# Altium PCB IsoUSBTest.PcbDoc
Units mm, origin at the board's own origin, x right, y up, seen from the top; angles counter-clockwise.
Board outline 42 x 28 mm, 2 copper layers (Component Side, Solder Side), stack 1.57 mm thick; 53 components, 36 nets, 156 pads, 31 vias.
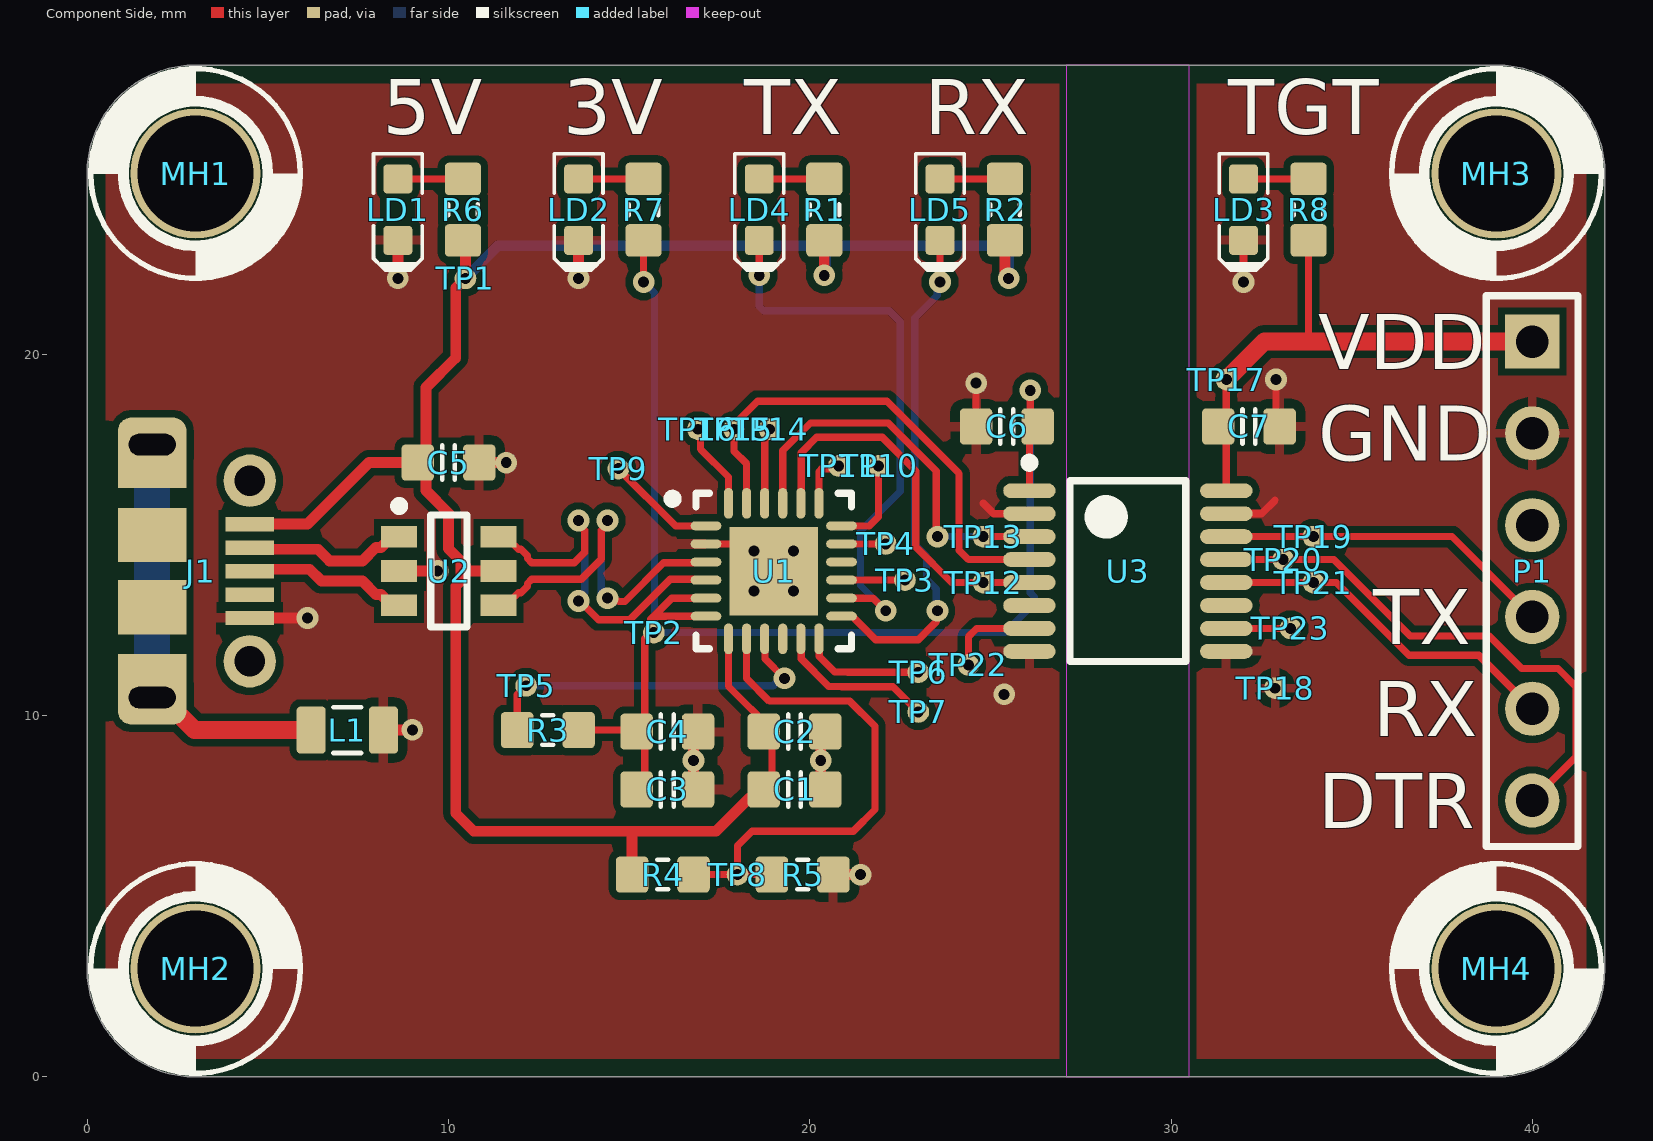
[diagram p0: Component Side view]
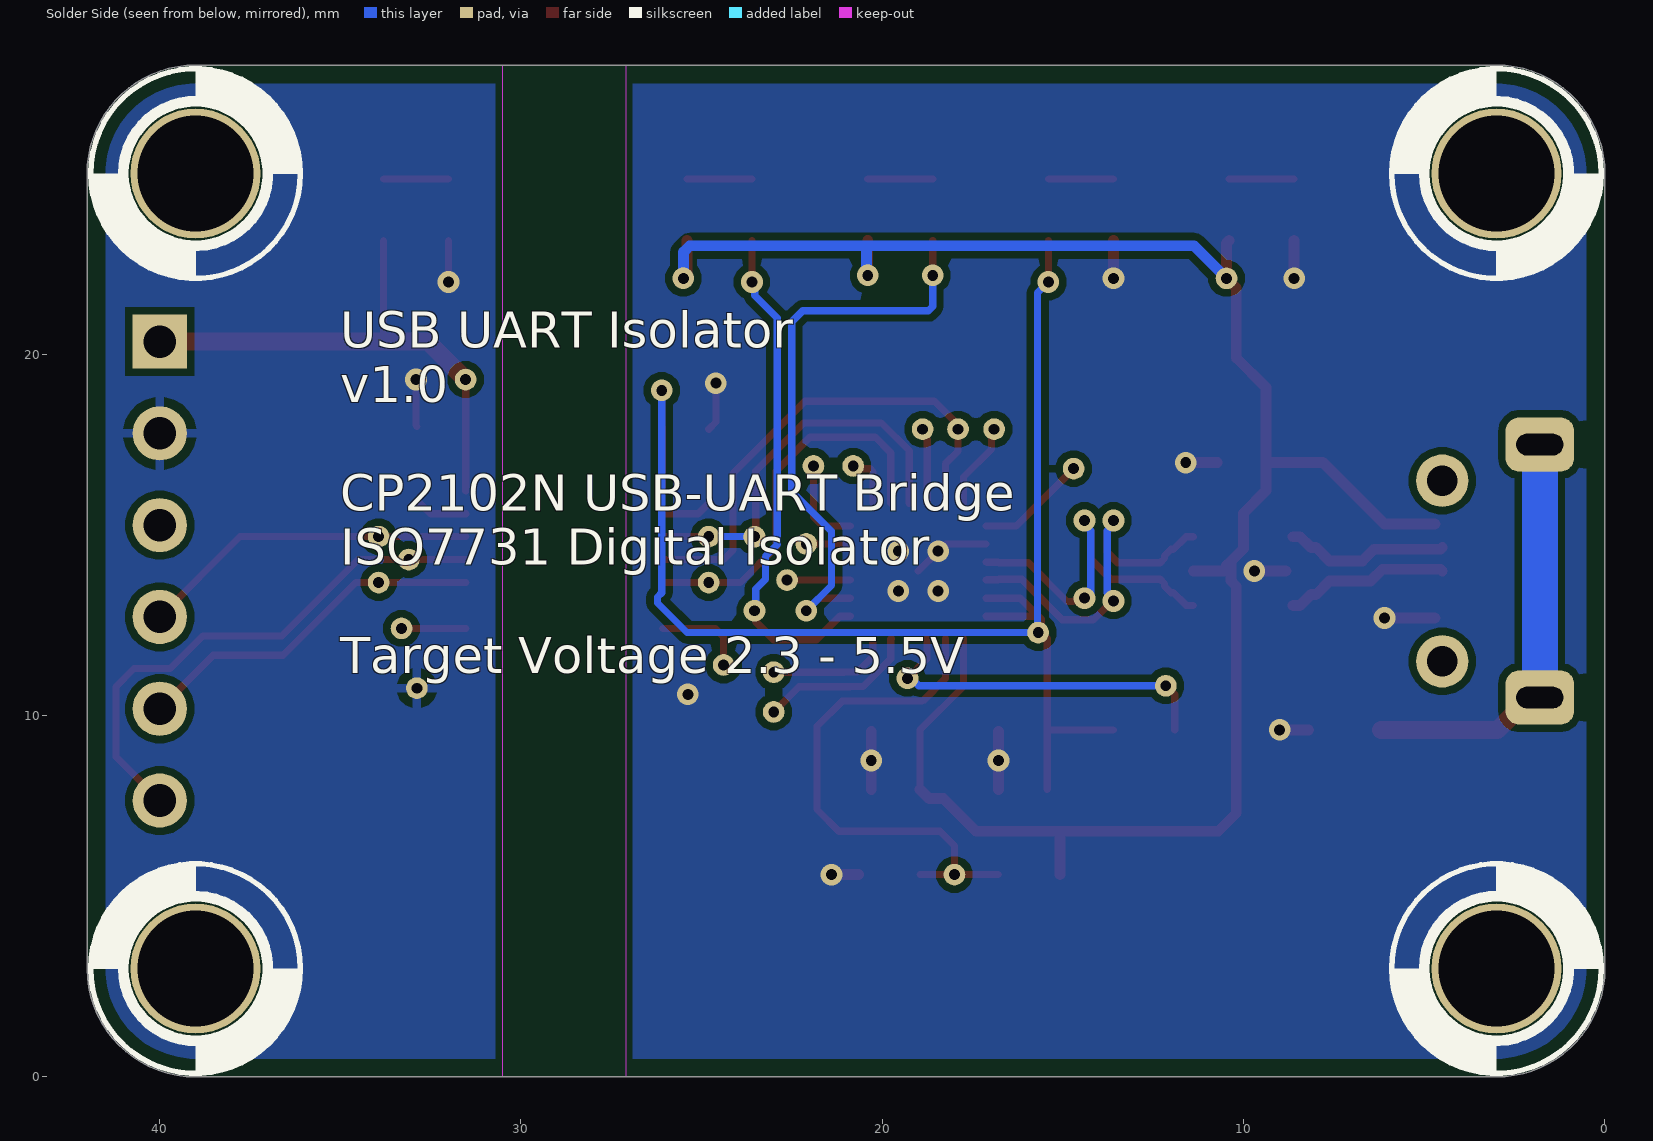
[diagram p1: Solder Side view, seen from below]
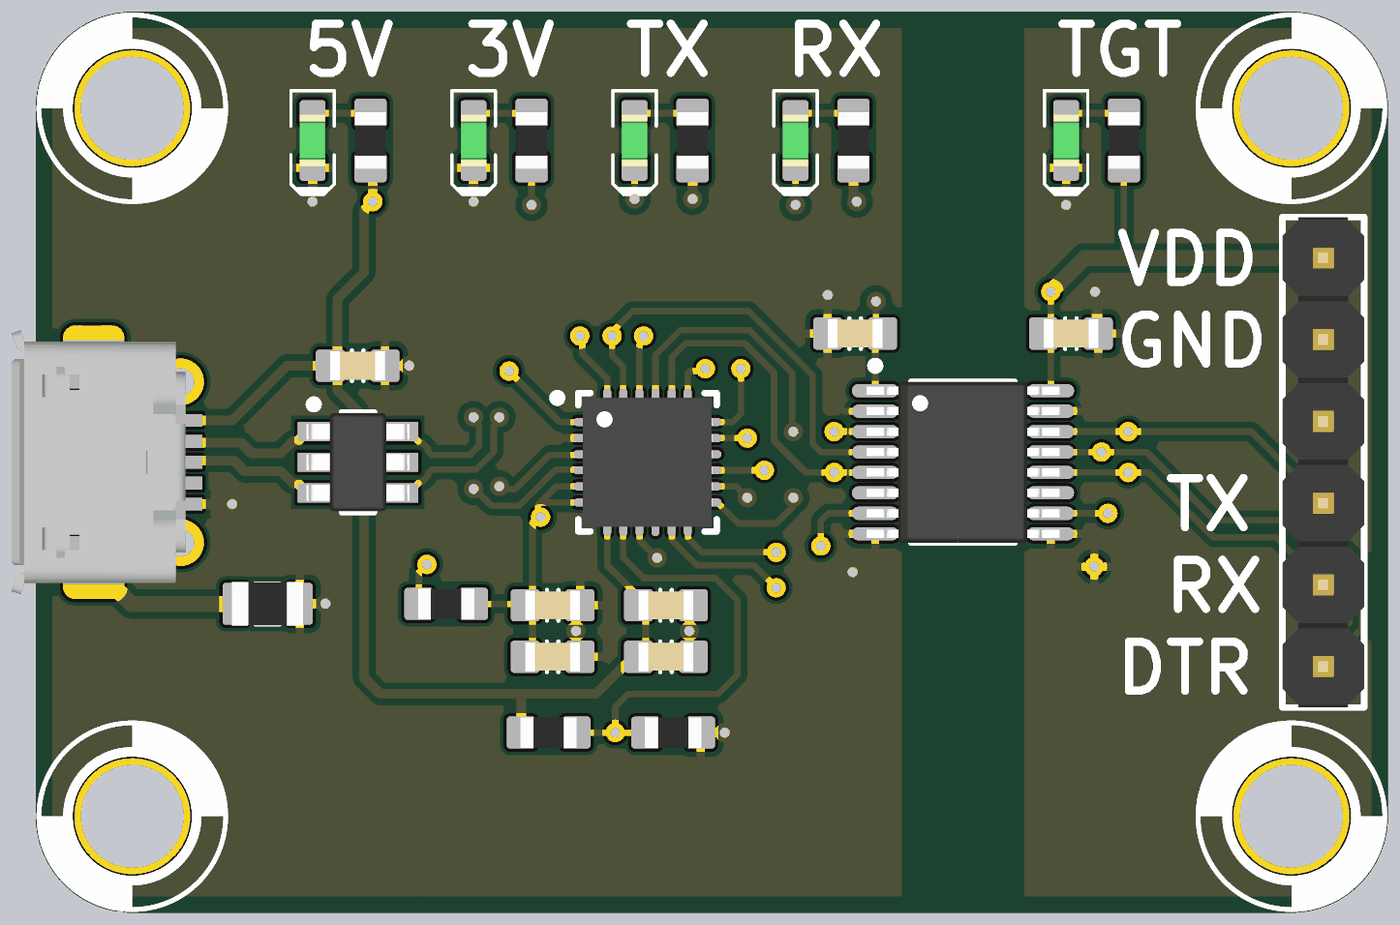
[diagram p2: 3D render of the assembled board from above, using the file's embedded part models]

## Layer stack, top to bottom
Top Solder: solder mask 0.0102, Solder Resist, Dk 3.5
Component Side: signal copper 0.035
Dielectric 3: prepreg 1.5, Dk 4.2
Solder Side: signal copper 0.035
Bottom Solder: solder mask 0.0102, Solder Resist, Dk 3.5

## Board outline
0,3 ccw(c3,3) 3,0 39,0 ccw(c39,3) 42,3 42,25 ccw(c39,25) 39,28 3,28 ccw(c3,25) 0,25

## Design rules (kind name [scope] priority, off if disabled: settings)
AssemblyTestPointUsage [All] p1 off:
AssemblyTestpoint [All] p1 off: testpointundercomponent=TRUE minsize=1.016 maxsize=2.54 preferedsize=1.524 minholesize=0 maxholesize=1.016 preferedholesize=0.813 testpointgrid=0.025 usegrid=TRUE gridtolerance=0 allowsidetop=TRUE allowsidebottom=TRUE
BoardOutlineClearance [All] p1: gap=0.254 ignorepadtopadclearanceinfootprint=FALSE except(0.5: Poly-OutlineEdge)
Clearance [All] p1: gap=0.2 ignorepadtopadclearanceinfootprint=FALSE
ComponentClearance [All] p1: gap=0.2 collisioncheckmode=3 verticalgap=0.25 showdistances=FALSE
DiffPairsRouting [All] p1: maxlimit=1 minlimit=0.254 mostfreqgap=0.254 toplayer_minwidth=0.2 toplayer_maxwidth=0.4 toplayer_prefwidth=0.254 bottomlayer_minwidth=0.2 bottomlayer_maxwidth=0.4 bottomlayer_prefwidth=0.254 maxuncoupledlength=12.7
FabricationTestPointUsage [All] p1 off: valid=0 allowmultiple=FALSE
FabricationTestpoint [All] p1 off: side=3 testpointundercomponent=TRUE minsize=1.016 maxsize=2.54 preferedsize=1.524 minholesize=0 maxholesize=1.016 preferedholesize=0.813 testpointgrid=0.025 allowsidetop=TRUE allowsidebottom=TRUE usegrid=TRUE gridtolerance=0
HoleSize [All] p1: absolutevalues=TRUE maxlimit=4 minlimit=0.025 maxpercent=80.000 minpercent=20.000
MinimumSolderMaskSliver [All] p1: minsoldermaskwidth=0
NetAntennae [All] p1 off: netantennaetolerance=0
PolygonConnect PolygonConnect_Via [All vs IsVia] p1: connectstyle=Direct reliefconductorwidth=0.254 reliefentries=4 polygonreliefangle="90 Angle" airgapwidth=0.254
PolygonConnect [All] p2: connectstyle=Relief reliefconductorwidth=0.254 reliefentries=4 polygonreliefangle="90 Angle" airgapwidth=0.254
RoutingVias [All] p1: holewidth=0.4 width=0.8 viastyle="Through Hole" minholewidth=0.3 minwidth=0.6 maxholewidth=1 maxwidth=1.5
SilkToSilkClearance [All] p1: silktosilkclearance=0.1
SilkToSolderMaskClearance SilkscreenOverComponentPads [IsPad] p1: minsilkscreentomaskgap=0 clearancetoexposedcopper=TRUE
SolderMaskExpansion [All] p1: expansion=0.102 istentingtop=FALSE
SupplyNets "Schematic Supply Nets_4" [InNet('TGT_GND')] p1: voltage=0.000
SupplyNets "Schematic Supply Nets_3" [InNet('USB_3V3')] p2: voltage=0.000
SupplyNets "Schematic Supply Nets_2" [InNet('TGT_VCC')] p3: voltage=0.000
SupplyNets "Schematic Supply Nets_1" [InNet('USBVCC')] p4: voltage=0.000
SupplyNets "Schematic Supply Nets" [InNet('USB_GND')] p5: voltage=0.000
Width Width_1 [All] p1: maxlimit=3 minlimit=0.2 preferedwidth=0.2 minimp=50.000000 maximp=50.000000 favimp=50.000000
19 further rules are at their usual default settings.

## Classes and differential pairs
differential pair USB_RAW: +USB_RAW_P -USB_RAW_N
differential pair USB_D: +USB_D_P -USB_D_N

## Components (designator, comment, footprint, x,y, rotation, side; value= is the part's Value field where it differs from the comment)
C1 "Capacitor" CAPC1608X90N 19.575,7.955 r180 top value=4.7µF
C2 "Capacitor" CAPC1608X90N 19.575,9.555 r180 top value=0.1µF
C3 "Capacitor" CAPC1608X90N 16.055,7.955 r180 top value=4.7µF
C4 "Capacitor" CAPC1608X90N 16.055,9.555 r180 top value=0.1µF
C5 "Capacitor" CAPC1608X90N 10,17 r180 top value=0.1µF
C6 "Capacitor" CAPC1608X90N 25.45,18 r0 top value=0.1µF
C7 "Capacitor" CAPC1608X90N 32.15,18 r180 top value=0.1µF
J1 "" "Micro-USB B Molex 105017-0001" 4.5,14 r270 top
L1 "" "Res 2012-0805" 7.2,9.6 r0 top
LD1 "LEDG  0603" "LED 1608-0603" 8.6,24 r270 top
LD2 "LEDG  0603" "LED 1608-0603" 13.6,24 r270 top
LD3 "LEDG  0603" "LED 1608-0603" 32,24 r270 top
LD4 "" "LED 1608-0603" 18.6,24 r270 top
LD5 "" "LED 1608-0603" 23.6,24 r270 top
MH1 "Screw Hole" M3-Hole-2 3,25 r90 top
MH2 "Screw Hole" M3-Hole-2 3,3 r0 top
MH3 "Screw Hole" M3-Hole-2 39,25 r0 top
MH4 "Screw Hole" M3-Hole-2 39,3 r90 top
P1 "Header 6" HDR1X6-HEADER 39.99,20.35 r270 top
R1 "" "RES 1608-0603" 20.4,24 r90 top value=1K
R2 "" "RES 1608-0603" 25.4,24 r90 top value=1K
R3 "" "RES 1608-0603" 12.75,9.6 r180 top value=1K
R4 "" "RES 1608-0603" 15.93,5.6 r180 top value=10K
R5 "" "RES 1608-0603" 19.8,5.6 r180 top value=22K
R6 "" "RES 1608-0603" 10.4,24 r90 top value=1K
R7 "" "RES 1608-0603" 15.4,24 r90 top value=1K
R8 "" "RES 1608-0603" 33.8,24 r90 top value=1K
TP1 "TESTPOINT" TP-THT_TINY 10.469,22.1 r0 top
TP2 "TESTPOINT" TP-THT_TINY 15.681,12.295 r90 top
TP3 "TESTPOINT" TP-THT_TINY 22.631,13.75 r90 top
TP4 "TESTPOINT" TP-THT_TINY 22.1,14.75 r90 top
TP5 "TESTPOINT" TP-THT_TINY 12.15,10.825 r90 top
TP6 "TESTPOINT" TP-THT_TINY 23,11.2 r90 top
TP7 "TESTPOINT" TP-THT_TINY 23,10.1 r90 top
TP8 "TESTPOINT" TP-THT_TINY 18,5.6 r90 top
TP9 "TESTPOINT" TP-THT_TINY 14.7,16.833 r90 top
TP10 "TESTPOINT" TP-THT_TINY 21.9,16.908 r90 top
TP11 "TESTPOINT" TP-THT_TINY 20.8,16.908 r90 top
TP12 "TESTPOINT" TP-THT_TINY 24.8,13.682 r90 top
TP13 "TESTPOINT" TP-THT_TINY 24.8,14.952 r90 top
TP14 "TESTPOINT" TP-THT_TINY 18.879,17.925 r90 top
TP15 "TESTPOINT" TP-THT_TINY 17.9,17.925 r90 top
TP16 "TESTPOINT" TP-THT_TINY 16.9,17.925 r90 top
TP17 "TESTPOINT" TP-THT_TINY 31.525,19.3 r90 top
TP18 "TESTPOINT" TP-THT_TINY 32.875,10.758 r90 top
TP19 "TESTPOINT" TP-THT_TINY 33.932,14.952 r90 top
TP20 "TESTPOINT" TP-THT_TINY 33.1,14.317 r90 top
TP21 "TESTPOINT" TP-THT_TINY 33.932,13.682 r90 top
TP22 "TESTPOINT" TP-THT_TINY 24.386,11.4 r90 top
TP23 "TESTPOINT" TP-THT_TINY 33.3,12.412 r90 top
U1 "CP2102N-24" QFN50P400X400X80_HS-25N 19,14 r0 top
U2 "USBLC6-2" SOT95P280X145-6N 10.009,14 r0 top
U3 "ISO7731DBQR" SOP64P600X175-16N 28.8,14 r0 top

## Footprints (in the part's own frame and the unit in brackets; to place one, negate y for a bottom-side part, rotate by r counter-clockwise, add the part's x,y. Pads: shape width x height; smd on the part's side, far side on the other; paste and mask are expansions set on the pad)
CAPC1608X90N [mm] "Chip Capacitor, Body 1.6x0.8mm, EIA 0603, IPC Medium Density"
  round 0.254 on Mech15: 0(0,0)
  rrect25% 0.9x1 smd: 1(-0.85,0) 2(0.85,0)
  Component Side pour cut-out: -0.6,0.5 -0.4,0.7 0.4,0.7 0.6,0.5 0.6,-0.5 0.4,-0.7 -0.4,-0.7 -0.6,-0.5
  silkscreen extent -0.18,-0.48 0.18,0.48, body extent -0.85,-0.45 0.85,0.45, height 0.89
HDR1X6-HEADER [mm]
  rect 1.5x1.5 hole 0.9: 1(0,0)
  round 1.5 hole 0.9: 2(2.54,0) 3(5.08,0) 4(7.62,0) 5(10.16,0) 6(12.7,0)
  silkscreen extent -1.27,-1.27 13.97,1.27, body extent -1.27,-1.27 13.97,1.27, height 8.6
"LED 1608-0603" [mm]
  round 0.254 on Mech15: 0(0,0)
  rrect25% 0.8x0.8 smd: 1(-0.85,0) 2(0.85,0)
  Component Side pour cut-out: -0.5,0.5 0.5,0.5 0.5,-0.5 -0.5,-0.5
  silkscreen extent -1.55,-0.67 1.68,0.67, body extent -0.8,-0.4 0.8,0.4, height 0.75
M3-Hole-2 [mm]
  round 3.6 hole 3.2: M3(0,0)
  silkscreen extent -2.9,-2.93 2.9,2.93
"Micro-USB B Molex 105017-0001" [mm]
  round 1.45 hole 0.85: 4(-2.5,0) 5(2.5,0)
  rect 1.5x1.9 smd: 6(-1,-2.7) 7(1,-2.7) SHIELD(-3.05,-2.7) SHIELD(3.05,-2.7)
  rect 0.4x1.35 smd: D+(0,0) D-(-0.65,0) GND(1.3,0) ID(0.65,0) VBUS(-1.3,0)
  rrect50% 1.5x1.9 hole 0.6 slot 1.3 at 90 deg paste-2539.97: SHIELD(-3.5,-2.7) SHIELD(3.5,-2.7)
  body extent -4.1,-5.25 4.1,0.15, height 2.68
QFN50P400X400X80_HS-25N [mm] "QFN, 24-Leads, Body 4.00x4.00mm, Pitch 0.50mm, Thermal Pad 2.45x2.45mm, IPC Medium Density"
  oval 0.85x0.25 smd: 1(-1.875,1.25) 2(-1.875,0.75) 3(-1.875,0.25) 4(-1.875,-0.25) 5(-1.875,-0.75) 6(-1.875,-1.25) 13(1.875,-1.25) 14(1.875,-0.75) 15(1.875,-0.25) 16(1.875,0.25) 17(1.875,0.75) 18(1.875,1.25)
  oval 0.25x0.85 smd: 7(-1.25,-1.875) 8(-0.75,-1.875) 9(-0.25,-1.875) 10(0.25,-1.875) 11(0.75,-1.875) 12(1.25,-1.875) 19(1.25,1.875) 20(0.75,1.875) 21(0.25,1.875) 22(-0.25,1.875) 23(-0.75,1.875) 24(-1.25,1.875)
  rect 2.45x2.45 smd: 25(0,0)
  silkscreen extent -2.92,-2.15 2.15,2.15, body extent -2.01,-2.01 2.01,2.01, height 0.8
"RES 1608-0603" [mm]
  round 0.254 on Mech15: 0(0,0)
  rrect25% 0.9x1 smd: 1(-0.85,0) 2(0.85,0)
  Component Side pour cut-out: -0.6,0.5 -0.4,0.7 0.4,0.7 0.6,0.5 0.6,-0.5 0.4,-0.7 -0.4,-0.7 -0.6,-0.5
  silkscreen extent -0.15,-0.41 0.15,0.41, body extent -0.87,-0.47 0.88,0.48, height 0.54
"Res 2012-0805" [mm]
  round 0.254 on Mech15: 0(0,0)
  rrect25% 0.8x1.3 smd: 1(-1,0) 2(1,0)
  Component Side pour cut-out: -0.725,0.65 -0.525,0.85 0.525,0.85 0.725,0.65 0.725,-0.65 0.525,-0.85 -0.525,-0.85 -0.725,-0.65
  silkscreen extent -0.38,-0.64 0.38,0.64, body extent -1.1,-0.67 1.1,0.68, height 0.69
SOP64P600X175-16N [mm] "SOP, 16-Leads, Body 4.91x3.90mm, Pitch 0.64mm, IPC Medium Density"
  oval 1.45x0.41 smd: 1(-2.725,2.222) 2(-2.725,1.587) 3(-2.725,0.953) 4(-2.725,0.318) 5(-2.725,-0.318) 6(-2.725,-0.953) 7(-2.725,-1.587) 8(-2.725,-2.222) 9(2.725,-2.222) 10(2.725,-1.587) 11(2.725,-0.953) 12(2.725,-0.318) 13(2.725,0.318) 14(2.725,0.953) 15(2.725,1.587) 16(2.725,2.222)
  silkscreen extent -2.85,-2.5 1.6,3.12, body extent -3,-2.5 3,2.5, height 1.75
SOT95P280X145-6N [mm] "SOT23, 6-Leads, Body 2.93x2.80mm, Pitch 0.95mm, IPC Medium Density"
  rect 1x0.6 smd: 1(-1.375,0.95) 2(-1.375,0) 3(-1.375,-0.95) 4(1.375,-0.95) 5(1.375,0) 6(1.375,0.95)
  silkscreen extent -1.5,-1.55 0.5,1.92, body extent -1.6,-1.53 1.6,1.53, height 1.45
TP-THT_TINY [mm]
  round 0.6 hole 0.3: 1(0,0)

## Part data
C1 C3: library part EMK107ABJ475KA-T, "CAP CER 4.7UF 16V X5R 0603", Manufacturer 1="Taiyo Yuden", Operating Temperature="-55°C ~ 85°C", Package=0402, Package / Case="0603 (1608 Metric)", Supplier Part Number 1=587-2786-1-ND, Temperature Coefficient=X5R, TOLERANCE=±10%, Voltage=16V, Manufacturer Part Number 1=EMK107ABJ475KA-T, Note="Approved sub OK", Revision="July-2002: Re-released for DXP Platform.", Size / Dimension="0.063\" L x 0.031\" W (1.60mm x 0.80mm)", Supplier 1=Digi-Key, Thickness (Max)="0.035\" (0.90mm)", Type=X5R
C2 C4 C5 C6 C7: library part EMK107B7104KAHT, "CAP CER 0.1UF 16V X7R 0603", Manufacturer 1="Taiyo Yuden", Operating Temperature="-55°C ~ 125°C", Package=0402, Package / Case="0603 (1608 Metric)", Supplier Part Number 1=587-6004-1-ND, Temperature Coefficient=X7R, TOLERANCE=±10%, Voltage=16V, Manufacturer Part Number 1=EMK107B7104KAHT, Note="Approved sub OK", Revision="July-2002: Re-released for DXP Platform.", Size / Dimension="0.063\" L x 0.031\" W (1.60mm x 0.80mm)", Supplier 1=Digi-Key, Thickness (Max)="0.035\" (0.90mm)", Type=X5R
J1: library part "Micro-USB B Socket", "CONN RCPT USB2.0 MICRO B SMD R/A", Supplier Part Number 1=WM1399CT-ND, Note="Approved sub OK", Supplier 1=Digi-Key
L1: library part "Ferrite Bead SMD 0805", "FERRITE BEAD 220 OHM 0805 1LN", Supplier Part Number 1=490-1054-1-ND, Note="Approved sub OK", Revision="July-2002: Re-released for DXP Platform.", Supplier 1=Digi-Key
LD1 LD2 LD3: "LED GREEN CLEAR CHIP SMD 0603", Supplier Part Number 1=160-1435-2-ND, Note="Approved sub OK", Supplier 1=Digi-Key
LD4 LD5: library part "LEDY  0603", "LED YELLOW CLEAR CHIP SMD 0603", Supplier Part Number 1=160-1437-1-ND, Note="Approved sub OK", Supplier 1=Digi-Key
P1: library part "Header 1X6", "Header, 6-Pin", Manufacturer 1="Generic Header", Note="Approved sub OK"
R1 R2 R3 R6 R7 R8: library part Res-0603-1K, "RES SMD 1K OHM 1% 1/10W 0603", Supplier Part Number 1=311-1.00KHRCT-ND, Note="Approved sub OK", Published=8-Jun-2000, Publisher="Altium Limited", Revision="July-2002: Re-released for DXP Platform.", Supplier 1=Digi-Key
R4: library part Res-0603-10K, "RES SMD 10K OHM 1% 1/10W 0603", Supplier Part Number 1=311-10.0KHRCT-ND, Note="Approved sub OK", Published=8-Jun-2000, Publisher="Altium Limited", Revision="July-2002: Re-released for DXP Platform.", Supplier 1=Digi-Key
R5: library part Res-0603-10K, "RES SMD 22K OHM 1% 1/10W 0603", Supplier Part Number 1=311-10.0KHRCT-ND, Note="Approved sub OK", Published=8-Jun-2000, Publisher="Altium Limited", Revision="July-2002: Re-released for DXP Platform.", Supplier 1=Digi-Key
TP1 TP2 TP3 TP4 TP5 TP6 TP7 TP8 TP9 TP10 TP11 TP12 TP13 TP14 TP15 TP16 TP17 TP18 TP19 TP20 TP21 TP22 TP23: "SMD test pin"
U1: library part "IC - CP2102N-24", Supplier Part Number 1=336-5887-ND, Supplier 1=Digikey
U2: library part "USBLC6-2 USB ESD Protection", "ESD Protection IC", Supplier Part Number 1=497-5235-1-ND, Supplier 1=Digi-Key
U3: library part "IC - TI ISO7731 Digital Isolator", "DGTL ISO 3000VRMS 3CH GP 16SSOP", Supplier Part Number 1=296-49656-1-ND, Supplier 1=Digikey

## Via types
v1: diameter 0.6, hole 0.3, Component Side to Solder Side, tented both sides, 27 vias
v2: diameter 0.6, hole 0.3, Component Side to Solder Side, 4 vias

## Nets (pads, with @x,y where several pads share a name; then routed paths per layer and width w, separated by ;. In a path a pad name is that pad's centre, name@x,y a point inside that pad or via, vN(x,y) a via of type N, cw(c..) or ccw(c..) an arc to the next point about the centre after c; other vN are vias at no path point)
NetJ1_SHIELD: J1.SHIELD L1.1 | length 11.8
  Component Side w0.5: J1.SHIELD@1.8,10.5 2.068,10.5 2.968,9.6 L1.1
  Solder Side w1: J1.SHIELD@1.8,10.5 J1.SHIELD@1.8,17.5
NetLD1_1: LD1.1 R6.2 | length 1.8
  Component Side w0.2: LD1.1 R6.2
NetLD2_1: LD2.1 R7.2 | length 1.8
  Component Side w0.2: LD2.1 R7.2
NetLD3_1: LD3.1 R8.2 | length 1.8
  Component Side w0.2: LD3.1 R8.2
NetLD4_1: LD4.1 R1.2 | length 1.8
  Component Side w0.2: LD4.1 R1.2
NetLD4_2: LD4.2 U1.14 | length 16
  Component Side w0.2: v1(18.6,22.181) LD4.2 ; U1.14 21.75,13.25 v1(22.1,12.9)
  Solder Side w0.2: v1(18.6,22.181) 18.6,21.317 18.717,21.2 22.2,21.2 22.5,20.9 22.5,16.2 21.4,15.1 21.4,13.6 v1(22.1,12.9)
NetLD5_1: LD5.1 R2.2 | length 1.8
  Component Side w0.2: LD5.1 R2.2
NetLD5_2: LD5.2 U1.13 | length 14.2
  Component Side w0.2: U1.13 21.175,12.75 21.825,12.1 23,12.1 23.5,12.6 23.5,12.87 v1(23.53,12.9) ; v1(23.6,22) LD5.2
  Solder Side w0.2: v1(23.53,12.9) 23.5,12.93 23.5,13.5 23.231,13.769 23.231,14.403 22.9,14.734 22.9,21 23.526,21.626 23.526,21.926 v1(23.6,22)
NetR3_2: R3.2 TP5.1 U1.9 | length 9.9
  Component Side w0.2: R3.2 11.9,10.575 TP5.1 ; U1.9 18.76,12.115 18.76,11.57 v1(19.3,11.029)
  Solder Side w0.2: TP5.1 18.987,10.825 19.192,11.029 v1(19.3,11.029)
NetR4_1: R4.1 R5.2 TP8.1 U1.8 | length 14.7
  Component Side w0.2: R4.1 TP8.1 ; U1.8 18.25,11.029 18.879,10.4 21.105,10.4 21.8,9.705 21.8,7.4 21.2,6.8 18.4,6.8 18,6.4 TP8.1 ; R5.2 TP8.1
NetTP3_1: TP3.1 U1.15 | length 1.8
  Component Side w0.2: U1.15 TP3.1
NetTP4_1: TP4.1 U1.17 | length 1.2
  Component Side w0.2: U1.17 TP4.1
NetTP6_1: TP6.1 U1.12 | length 3.4
  Component Side w0.2: U1.12 20.26,12.115 20.26,11.635 20.69,11.205 21.041,11.205 21.046,11.2 TP6.1
NetTP7_1: TP7.1 U1.11 | length 4.4
  Component Side w0.2: U1.11 19.76,12.115 19.76,11.569 20.524,10.805 20.875,10.805 20.88,10.8 22.3,10.8 TP7.1
NetTP9_1: TP9.1 U1.1 | length 3.1
  Component Side w0.2: TP9.1 16.283,15.25 U1.1
NetTP10_1: TP10.1 U1.18 | length 2.5
  Component Side w0.2: U1.18 21.65,15.25 21.9,15.5 TP10.1
NetTP11_1: TP11.1 U1.19 | length 1.5
  Component Side w0.2: U1.19 20.25,16.758 20.325,16.833 20.725,16.833 TP11.1
NetTP14_1: TP14.1 U1.22 | length 2.1
  Component Side w0.2: U1.22 18.75,17.644 18.879,17.773 TP14.1
NetTP16_1: TP16.1 U1.24 | length 2.4
  Component Side w0.2: TP16.1 16.977,17.848 16.977,17.373 17.75,16.6 U1.24
NetTP22_1: TP22.1 U3.7 | length 2.6
  Component Side w0.2: TP22.1 24.386,12.181 24.618,12.412 U3.7
NetTP23_1: TP23.1 U3.10 | length 1.8
  Component Side w0.2: U3.10 TP23.1
TGT_GND: C7.1 LD3.2 P1.2 TP18.1 U3.9 U3.15 | length 4
  Component Side w0.2: U3.15 32.5,15.587 32.875,15.963 ; v1(32,22) LD3.2 ; C7.1@32.875,18 32.9,18.025 v1(32.9,19.3)
TGT_UART_DTR: P1.6 TP20.1 U3.13 | length 14.8
  Component Side w0.2: U3.13 32.875,14.317 34.496,14.317 36.613,12.2 38.8,12.2 39.7,11.3 40.7,11.3 41.2,10.8 41.2,8.86 P1.6
TGT_UART_RX: P1.5 TP21.1 U3.12 | length 9.9
  Component Side w0.2: U3.12 33.3,13.682 34.565,13.682 36.578,11.669 38.511,11.669 P1.5
TGT_UART_TX: P1.4 TP19.1 U3.14 | length 9.4
  Component Side w0.2: U3.14 37.767,14.952 P1.4
TGT_VCC: C7.2 P1.1 R8.1 TP17.1 U3.16 | length 14.8
  Component Side w0.2: U3.16 31.525,18 TP17.1 ; 33.8,20.35 R8.1
  Component Side w0.5: TP17.1 32.575,20.35 33.8,20.35 P1.1
UART_DTR: TP15.1 U1.23 U3.4 | length 13.8
  Component Side w0.2: U1.23 18.25,16.966 17.9,17.316 17.9,18.05 18.55,18.7 22.133,18.7 24.13,16.703 24.13,14.574 24.386,14.317 U3.4
UART_RX: TP12.1 U1.20 U3.5 | length 10.8
  Component Side w0.2: U1.20 19.76,15.885 19.76,17.276 20.183,17.7 22.001,17.7 22.93,16.771 22.93,14.67 23.918,13.682 24.7,13.682 U3.5
UART_TX: TP13.1 U1.21 U3.3 | length 10.9
  Component Side w0.2: U1.21 19.25,17.333 20.017,18.1 22.167,18.1 23.5,16.767 23.5,14.982 v1(23.53,14.952) ; TP13.1 U3.3
  Solder Side w0.2: v1(23.53,14.952) TP13.1
USB_3V3: C3.2 C4.2 C6.2 R3.1 R7.1 TP2.1 U1.5 U1.6 U3.1 | length 40.4
  Component Side w0.2: R3.1 15.385,9.6 C4.2@15.43,9.555 ; v1(15.4,22) R7.1 ; C3.2@15.43,7.955 C4.2@15.43,9.555 ; 15.6,12.649 15.6,12.295 15.43,12.125 C4.2@15.43,9.555 ; 15.6,12.669 15.681,12.75 ; U1.6 15.681,12.75 ; U1.5 16.181,13.25 15.681,12.75 ; U3.1 26.075,18 26.1,18.025 v1(26.1,19)
  Solder Side w0.2: v1(15.4,22) 15.7,21.7 15.7,12.3 25.4,12.3 26.217,13.117 26.217,13.283 26.1,13.4 v1(26.1,19)
USB_D_N: U1.4 U2.6 | length 10.5
  Component Side w0.2: U2.6 11.584,14.95 11.934,14.6 12.009,14.6 12.184,14.424 12.184,14.344 12.301,14.227 13.483,14.227 13.773,14.517 13.773,15.119 13.6,15.292 v1(13.6,15.4) ; v1(13.6,13.173) 13.6,13.065 13.737,13.065 14.151,12.65 15.015,12.65 16.138,13.773 16.767,13.773 16.78,13.76 17.115,13.76 U1.4
  Solder Side w0.2: v1(13.6,13.173) 13.6,13.227 13.773,13.4 13.773,15.119 13.6,15.292 v1(13.6,15.4)
USB_D_P: U1.3 U2.4 | length 10.1
  Component Side w0.2: U2.4 11.584,13.05 11.934,13.4 12.009,13.4 12.184,13.576 12.184,13.656 12.301,13.773 13.671,13.773 14.227,14.329 14.227,15.119 14.4,15.292 v1(14.4,15.4) ; v1(14.4,13.25) 14.477,13.173 14.703,13.173 14.717,13.16 14.883,13.16 15.95,14.227 16.767,14.227 16.78,14.24 17.115,14.24 U1.3
  Solder Side w0.2: v1(14.4,13.25) 14.377,13.25 14.227,13.4 14.227,15.119 14.4,15.292 v1(14.4,15.4)
USB_GND: C1.1 C2.1 C3.1 C4.1 C5.1 C6.1 J1.GND L1.2 LD1.2 LD2.2 R5.1 U1.2 U1.25 U2.2 U3.2 U3.8 | length 14.9
  Component Side w0.2: U1.2 18.25,14.75 v2(18.45,14.55) U1.25 ; v1(24.6,19.201) 24.6,18.125 C6.1@24.8,17.925 ; 24.8,15.875 25.088,15.587 U3.2
  Component Side w0.3: J1.GND@4.7,12.7 v1(6.1,12.7) ; L1.2 8.205,9.605 v1(9,9.605) ; v1(8.6,22.1) LD1.2 ; U2.2@8.825,14 v1(9.7,14) ; C5.1@10.725,17 v1(11.6,17) ; v1(13.6,22.1) LD2.2 ; C3.1@16.78,7.955 C4.1@16.78,9.555 ; C1.1@20.3,7.955 C2.1@20.3,9.555 ; R5.1 v1(21.4,5.6)
  other v1: 16.78,8.755 20.3,8.755 25.376,10.586
  other v2: 18.45,13.45 19.55,13.45 19.55,14.55
USB_RAW_N: J1.D- U2.1 | length 4.6
  Component Side w0.3: J1.D- 4.548,14.602 6.387,14.602 6.712,14.277 7.616,14.277 7.989,14.65 8.134,14.65 8.434,14.95 U2.1
USB_RAW_P: J1.D+ U2.3 | length 4.6
  Component Side w0.3: J1.D+ 4.548,14.048 6.157,14.048 6.482,13.723 7.616,13.723 7.989,13.35 8.134,13.35 8.434,13.05 U2.3
USBVCC: C1.2 C2.2 C5.2 J1.VBUS R1.1 R2.1 R4.2 R6.1 TP1.1 U1.7 U2.5 | length 57.8
  Component Side w0.2: U1.7 17.75,10.805 18.95,9.605 C1.2@18.95,7.955
  Component Side w0.3: J1.VBUS@4.7,15.3 6.1,15.3 7.8,17 C5.2@9.375,17 ; R6.1 10.469,23.081 TP1.1 10.2,21.831 10.2,19.9 9.375,19.075 C5.2@9.375,17 ; 10.469,14.15 10.35,14.269 ; U2.5 10.35,14 ; R4.2 15.08,6.735 15.015,6.8 ; C1.2@18.95,7.955 18.704,7.709 18.309,7.709 17.4,6.8 15.015,6.8 ; v1(20.4,22.181) R1.1 ; R2.1 25.4,22.281 25.5,22.181 v1(25.5,22.1) ; C5.2@9.375,17 9.375,16.225 10,15.6 10,14.619 10.35,14.269 ; 10.35,14 10.35,14.269 ; 10.35,14 10.35,13.731 10.2,13.581 10.2,7.3 10.7,6.8 15.015,6.8
  Solder Side w0.3: TP1.1 11.369,23 20.5,23 ; v1(20.4,22.181) 20.431,22.212 20.431,22.931 20.5,23 ; v1(25.5,22.1) 25.5,22.824 25.324,23 20.5,23
pads on no net: C1.0 C2.0 C3.0 C4.0 C5.0 C6.0 C7.0 J1.4 J1.5 J1.6 J1.7 J1.ID L1.0 LD1.0 LD2.0 LD3.0 LD4.0 LD5.0 MH1.M3 MH2.M3 MH3.M3 MH4.M3 P1.3 R1.0 R2.0 R3.0 R4.0 R5.0 R6.0 R7.0 R8.0 U1.10 U1.16 U3.6 U3.11

## Polygon pours and split planes (outlines as drawn)
TGT_GND on Component Side "TGT_GND_L01_P002" (solid, pour order 2): 30.5,28 30.5,0 42,0 42,28
USB_GND on Component Side "USB_GND_L01_P000" (solid, pour order 0): 0,28 0,0 27,0 27,28
TGT_GND on Solder Side "TGT_GND_L02_P003" (solid, pour order 3): 30.5,28 30.5,0 42,0 42,28
USB_GND on Solder Side "USB_GND_L02_P001" (solid, pour order 1): 0,28 0,0 27,0 27,28

## Keep-outs
Component Side:
  rectangle: 27.1,0 30.5,28
Solder Side:
  rectangle: 27.1,0 30.5,28

## Silkscreen, mask and mechanical layers (free items; w line width, h text height)
Top Overlay:
  text "5V" at 8.179,26.091 h1.52
  text "3V" at 13.179,26.091 h1.52
  text "TX" at 18.179,26.091 h1.52
  text "RX" at 23.179,26.091 h1.52
  text "TGT" at 31.579,26.091 h1.52
  text "VDD" at 34.073,19.588 h1.52
  text "GND" at 34.063,17.048 h1.52
  text "TX" at 35.587,11.968 h1.52
  text "RX" at 35.587,9.428 h1.52
  text "DTR" at 34.063,6.888 h1.52
Bottom Overlay:
  text "USB UART Isolator / v1.0 /  / CP2102N USB-UART Bridge / ISO7731 Digital Isolator /  / Target Voltage 2.3 - 5.5V" at 35,11.175 h1
Mechanical 1:
  lines w0.254: -1,14 50,14
Mechanical 4:
  the board outline again, w0.254